# EAGLE board MiniPrinterController (EAGLE 9.6.2), part 1 of 2
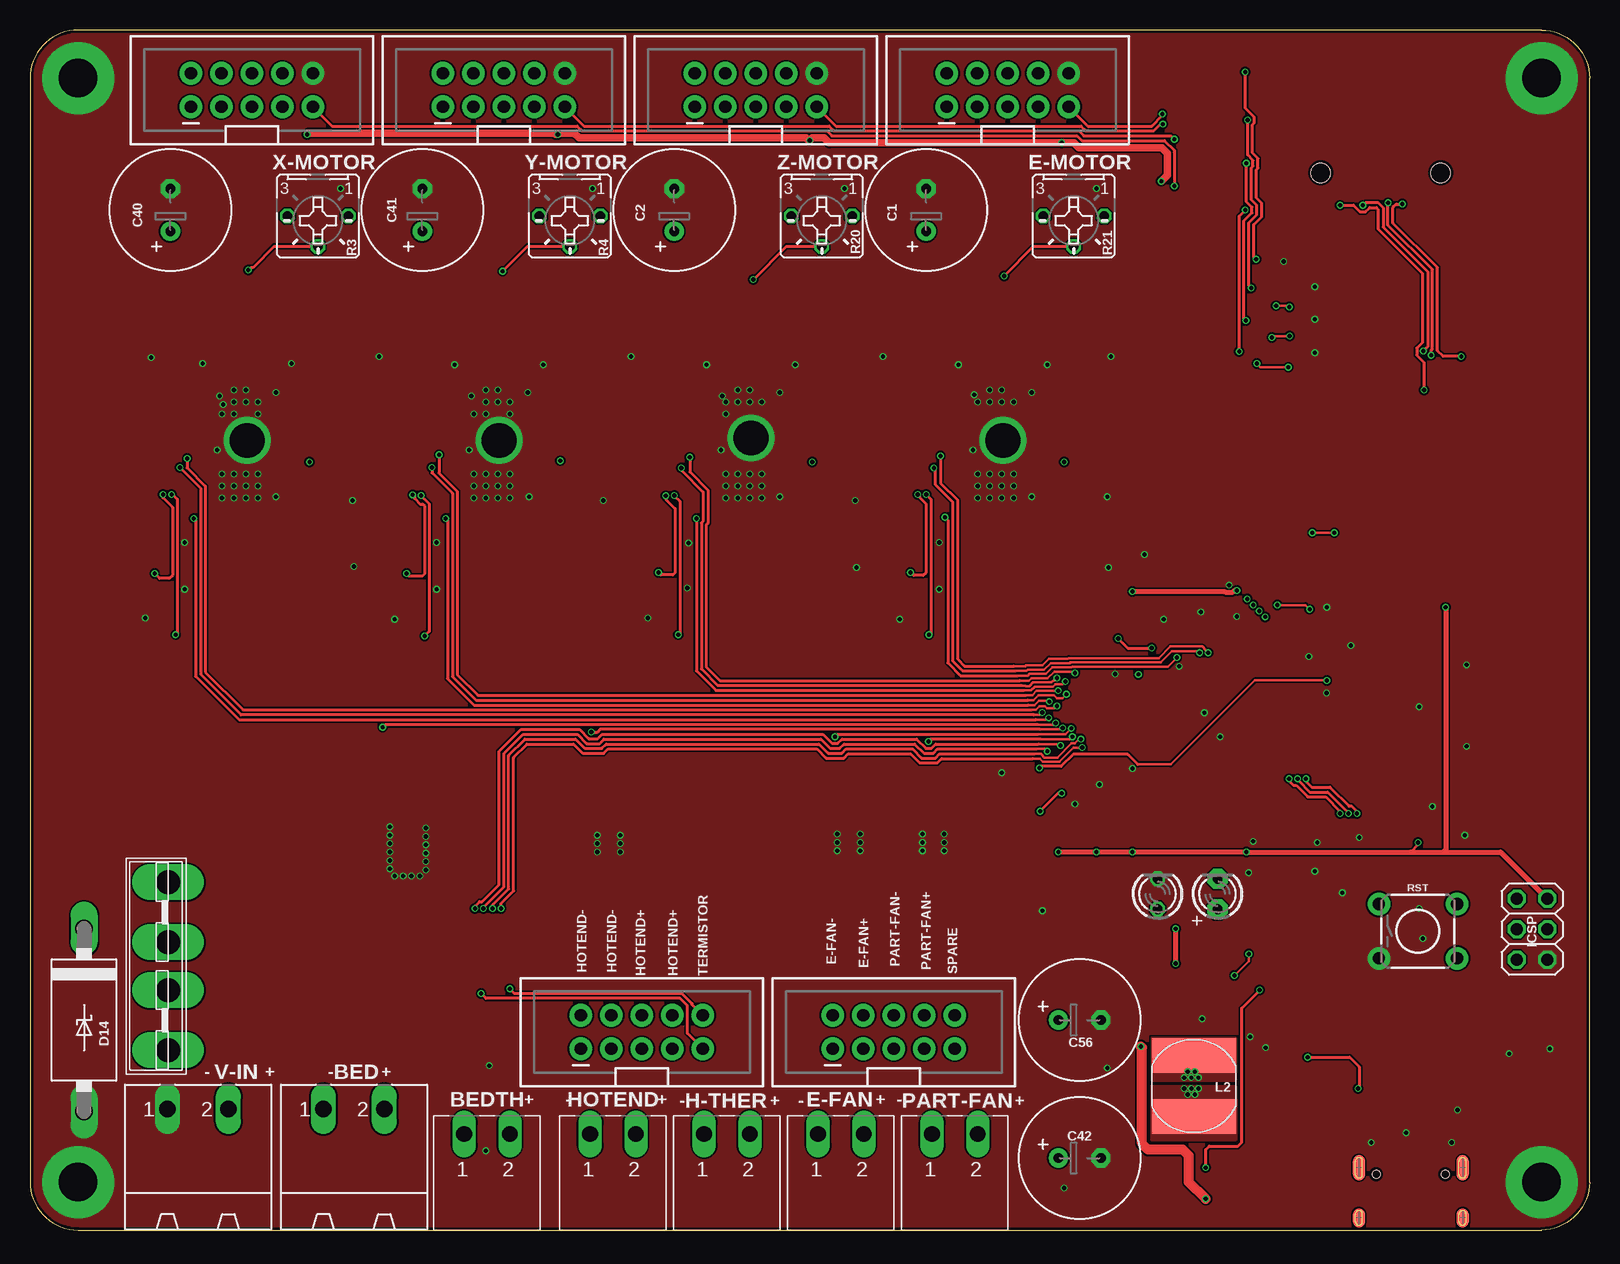
[diagram p0: board, top side]
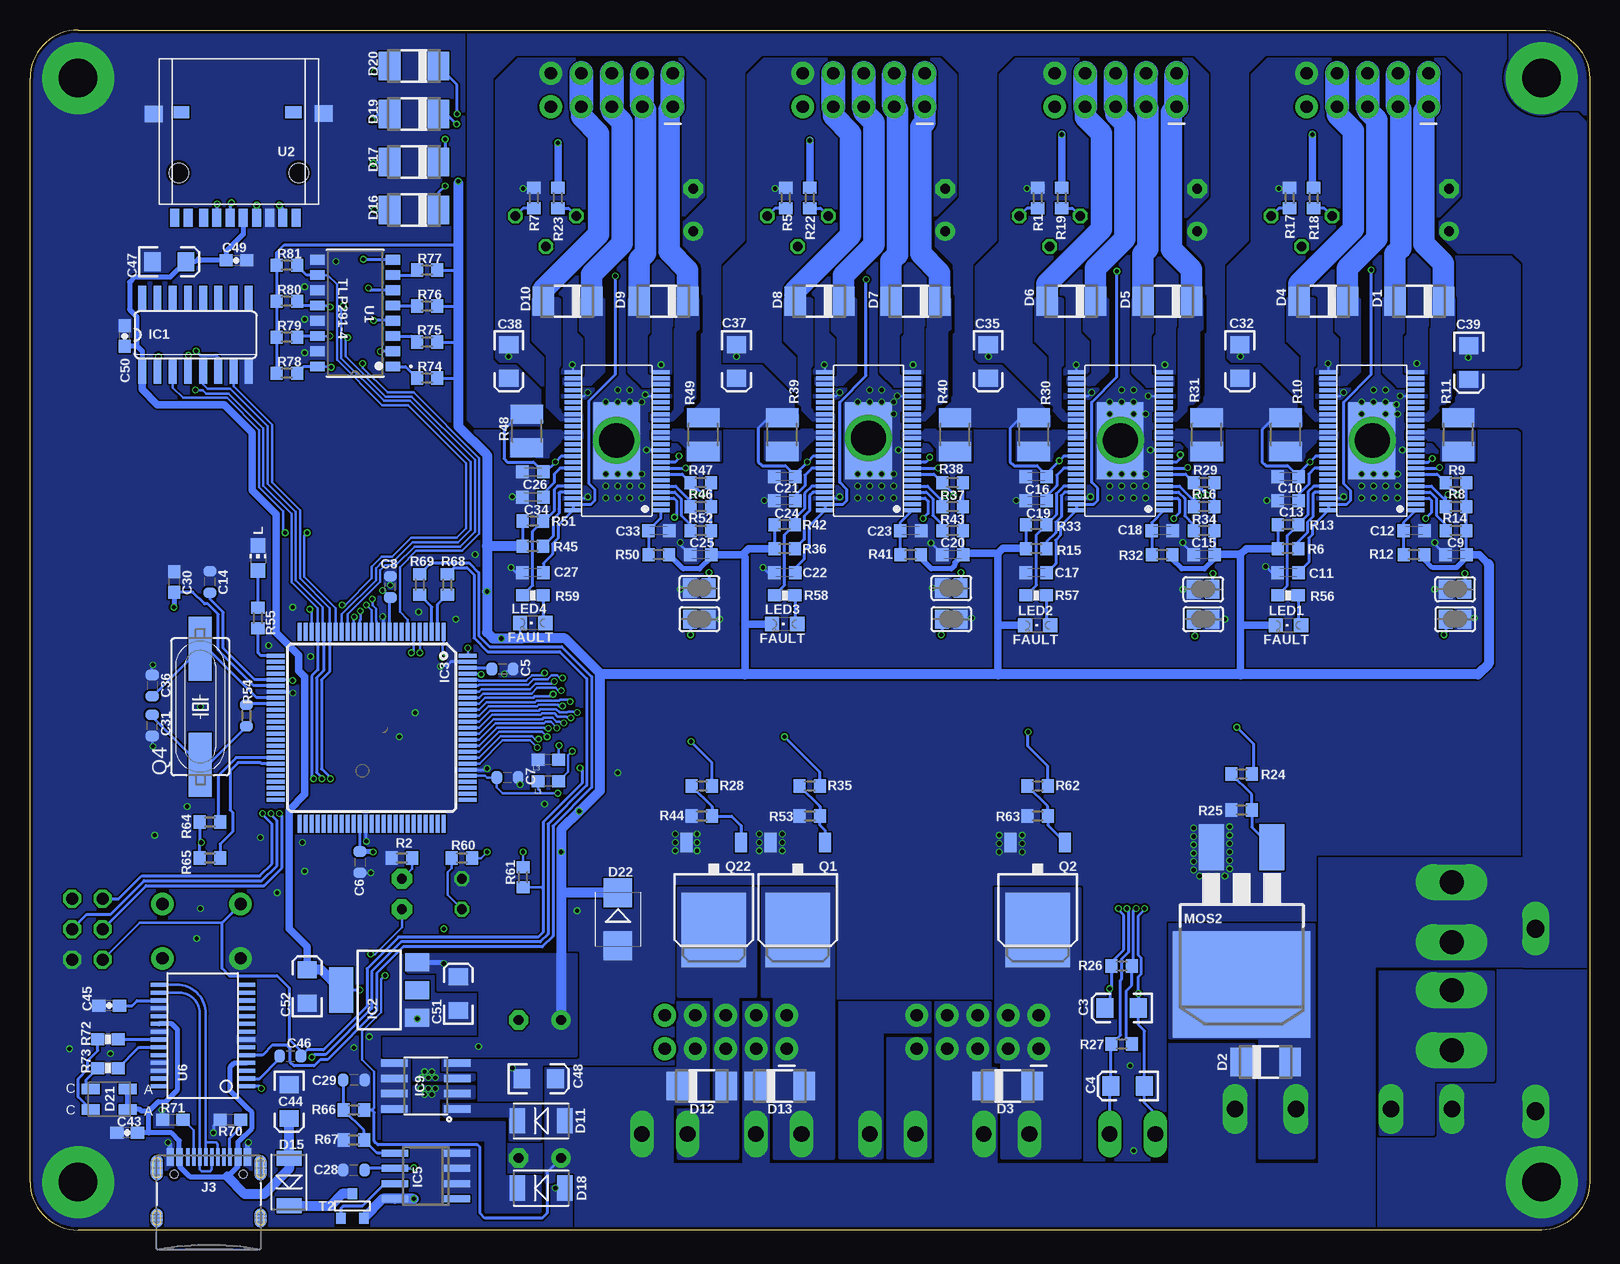
[diagram p1: board, bottom side, seen from below]

Size 130 x 100 mm. Coordinates in mm from the lower left corner, seen from the top.
Outline: 4,0 126,0 arc90 130,4 130,96 arc90 126,100 4,100 arc90 0,96 0,4 arc90 4,0
Copper layers (1*16): Top 0.035mm / dielectric 0.2mm / Bottom 0.035mm
Design rules "SeeedStudio_4layer_DRU_no_angle_20140221 *": minimum track width 8mil, minimum drill 12mil, track to track 6mil, track to pad 6mil, pad to pad 6mil, via to via 6mil, smd to smd 0mil, copper to edge 10mil, drill to drill 8mil, minimum pad ring 6mil, minimum via ring 4mil, stop-mask expansion 4mil, vias tented up to drill 25mil, thermal gap 10mil
Net classes: 0 default: width 0.203 mm, clearance 0.152 mm

## Footprints (pad centres in the part's own frame; a part is rotated, then mirrored left to right if it is on the bottom)
MSTBA2 = drill 1.397 long: 1 -2.54,5.08; 2 2.54,5.08
MC1.5/2-G-3.81 = drill 1.3 long: 1 -3.81,8; 2 0,8
E3,5-10 = drill 0.813 pad 1.6: + -1.778,0 | drill 0.813 pad 1.6 octagon: - 1.778,0
EIA3216 = smd 1.4 x 1.6: A 1.4,0; C -1.4,0
C0603-ROUND = smd 0.898 x 1.1: 1 -0.889,0; 2 0.889,0
C0603K = smd 1.05 x 1.08: 1 -0.875,0; 2 0.875,0
C0603 = smd 1.1 x 1: 1 -0.85,0; 2 0.85,0
0603-CAP = smd 1.1 x 1: 1 -0.85,0; 2 0.85,0
DO-214AC = smd 1.8 x 2.4: A 2.025,0; C -2.025,0
DO-214AC' = smd 1.27 x 2.1: 1 -1.98,0; 2 1.98,0
C4111-15 = drill 1.499 long: A 7.62,0; C -7.62,0
3528 = smd 1.5 x 0.9: 1 1.55,0.85; 2 1.55,-0.85; 3 -1.55,0.85; 4 -1.55,-0.85
SMB = smd 2.4 x 2.4: A 2.2,0; C -2.2,0
SO16 = smd 0.66 x 2.032: 1 -4.445,-3.073; 2 -3.175,-3.073; 3 -1.905,-3.073; 4 -0.635,-3.073; 5 0.635,-3.073; 6 1.905,-3.073; 7 3.175,-3.073; 8 4.445,-3.073; 9 4.445,3.073; 10 3.175,3.073; 11 1.905,3.073; 12 0.635,3.073; 13 -0.635,3.073; 14 -1.905,3.073; 15 -3.175,3.073; 16 -4.445,3.073
SOT223 = smd 1.5 x 2: 1 -2.3,-3.15; 2 0,-3.15; 3 2.3,-3.15 | smd 3.8 x 2: 4 0,3.15
TQFP100 = smd 1.5 x 0.35: 1 -8,6; 2 -8,5.5; 3 -8,5; 4 -8,4.5; 5 -8,4; 6 -8,3.5; 7 -8,3; 8 -8,2.5; 9 -8,2; 10 -8,1.5; 11 -8,1; 12 -8,0.5; 13 -8,0; 14 -8,-0.5; 15 -8,-1; 16 -8,-1.5; 17 -8,-2; 18 -8,-2.5; 19 -8,-3; 20 -8,-3.5; 21 -8,-4; 22 -8,-4.5; 23 -8,-5; 24 -8,-5.5; 25 -8,-6; 51 8,-6; 52 8,-5.5; 53 8,-5; 54 8,-4.5; 55 8,-4; 56 8,-3.5; 57 8,-3; 58 8,-2.5; 59 8,-2; 60 8,-1.5; 61 8,-1; 62 8,-0.5; 63 8,0; 64 8,0.5; 65 8,1; 66 8,1.5; 67 8,2; 68 8,2.5; 69 8,3; 70 8,3.5; 71 8,4; 72 8,4.5; 73 8,5; 74 8,5.5; 75 8,6 | smd 0.35 x 1.5: 26 -6,-8; 27 -5.5,-8; 28 -5,-8; 29 -4.5,-8; 30 -4,-8; 31 -3.5,-8; 32 -3,-8; 33 -2.5,-8; 34 -2,-8; 35 -1.5,-8; 36 -1,-8; 37 -0.5,-8; 38 0,-8; 39 0.5,-8; 40 1,-8; 41 1.5,-8; 42 2,-8; 43 2.5,-8; 44 3,-8; 45 3.5,-8; 46 4,-8; 47 4.5,-8; 48 5,-8; 49 5.5,-8; 50 6,-8; 76 6,8; 77 5.5,8; 78 5,8; 79 4.5,8; 80 4,8; 81 3.5,8; 82 3,8; 83 2.5,8; 84 2,8; 85 1.5,8; 86 1,8; 87 0.5,8; 88 0,8; 89 -0.5,8; 90 -1,8; 91 -1.5,8; 92 -2,8; 93 -2.5,8; 94 -3,8; 95 -3.5,8; 96 -4,8; 97 -4.5,8; 98 -5,8; 99 -5.5,8; 100 -6,8
SO08 = smd 0.6 x 2.2: 1 -1.905,-2.6; 2 -0.635,-2.6; 3 0.635,-2.6; 4 1.905,-2.6; 5 1.905,2.6; 6 0.635,2.6; 7 -0.635,2.6; 8 -1.905,2.6
SO08' = smd 0.61 x 2.21: 1 -1.905,-2.616; 2 -0.635,-2.616; 3 0.635,-2.616; 4 1.905,-2.616; 5 1.905,2.616; 6 0.635,2.616; 7 -0.635,2.616; 8 -1.905,2.616
2X03 = drill 1.016 octagon: 1 -2.54,-1.27; 2 -2.54,1.27; 3 0,-1.27; 4 0,1.27; 5 2.54,-1.27; 6 2.54,1.27
2X5-SHROUDED_LOCK = drill 1.016 pad 1.88: 1 -1.397,5.08; 2 1.397,5.08; 3 -1.397,2.54; 4 1.397,2.54; 5 -1.397,0; 6 1.397,0; 7 -1.397,-2.54; 8 1.397,-2.54; 9 -1.397,-5.08; 10 1.397,-5.08
USB-C-16P = smd 0.3 x 1.45: A5 -1.25,0; A6 -0.25,0; A7 0.25,0; A8 1.25,0; B5 1.75,0; B6 0.75,0; B7 -0.75,0; B8 -1.75,0 | smd 0.6 x 1.45: GND -3.225,0; GND2 3.225,0 | smd 1 x 2.1: SHLD1 -4.32,-0.915; SHLD2 4.32,-0.915 | smd 1 x 2.1 bottom: SHLD3 -4.32,-0.915; SHLD4 4.32,-0.915 | smd 1 x 1.6: SHLD5 -4.32,-5.095; SHLD8 4.32,-5.095 | smd 1 x 1.6 bottom: SHLD6 -4.32,-5.095; SHLD7 4.32,-5.095 | smd 0.55 x 1.45: VBUS1 -2.45,0; VBUS2 2.45,0 | hole 0.65: -2.89,-1.445; 2.89,-1.445
CHIP-LED0805 = smd 1.2 x 1.2: A 0,-1.05; C 0,1.05
0603 = smd 1.1 x 1: 1 -0.85,0; 2 0.85,0
CD75 = smd 7 x 2.85: 1 0,2.54; 2 0,-2.54
CHIPLED_0805 = smd 1.2 x 1.2: A 0,-1.05; C 0,1.05
LED3MM = drill 0.813 pad 1.676 octagon: A -1.27,0; K 1.27,0
D2PACK = smd 2.083 x 3.81: 1 -2.54,-8.89; 3 2.54,-8.89 | smd 11.43 x 8.89: 2 0,2.54
LED3MM' = drill 0.813 octagon: A -1.27,0; K 1.27,0
D-PAK_TO252AA = smd 1 x 1.6: 1 -2.28,-4.8; 3 2.28,-4.8 | smd 5.4 x 6.2: 4 0,2.5
HC49UP = smd 5.334 x 1.93: 1 -4.826,0; 2 4.826,0
R0603 = smd 1 x 1.1: 1 -0.85,0; 2 0.85,0
B25P = drill 0.813 octagon: A -2.54,0; E 2.54,0; S 0,2.54
R1210 = smd 1.6 x 2.7: 1 -1.4,0; 2 1.4,0
R0603@1 = smd 1 x 1.1: 1 -0.85,0; 2 0.85,0
R0603-ROUND = smd 0.898 x 1.1: 1 -0.889,0; 2 0.889,0
0603-RES = smd 1.1 x 1: 1 -0.85,0; 2 0.85,0
0603@1 = smd 1.1 x 1: 1 -0.85,0; 2 0.85,0
TACTILE_SWITCH_PTH_6.0MM = drill 1.016 pad 1.88: 1 -3.251,2.261; 2 3.251,2.261; 3 -3.251,-2.261; 4 3.251,-2.261
SJ = smd 1.168 x 1.6: 1 -0.762,0; 2 0.762,0
SOT-23 = smd 0.787 x 0.889: 1 0.025,-1.016; 2 -0.94,1.016; 3 0.991,1.016
SO16_TOS = smd 1.194 x 0.813: 1 -3.15,4.445; 2 -3.15,3.175; 3 -3.15,1.905; 4 -3.15,0.635; 5 -3.15,-0.635; 6 -3.15,-1.905; 7 -3.15,-3.175; 8 -3.15,-4.445; 9 3.15,-4.445; 10 3.15,-3.175; 11 3.15,-1.905; 12 3.15,-0.635; 13 3.15,0.635; 14 3.15,1.905; 15 3.15,3.175; 16 3.15,4.445
USD-SOCKET-PP = smd 0.75 x 1.5: 1 2.925,1.125; 2 1.825,1.125; 3 0.725,1.125; 4 -0.375,1.125; 5 -1.475,1.125; 6 -2.575,1.125; 7 -3.675,1.125; 8 -4.775,1.125; CD1 5.325,1.125; CD2 4.225,1.125 | smd 1.4 x 1: CDNC1 -4.55,-7.65 | smd 1.3 x 1: CDNC2 4.775,-7.65 | smd 1.5 x 1.35: GND1 -7.075,-7.55; GND2 7.075,-7.5 | hole 1.6: -5,-2.6; 5,-2.6
SSOP28DB = smd 0.348 x 1.397: 1 -4.225,-3.656; 2 -3.575,-3.656; 3 -2.925,-3.656; 4 -2.275,-3.656; 5 -1.625,-3.656; 6 -0.975,-3.656; 7 -0.325,-3.656; 8 0.325,-3.656; 9 0.975,-3.656; 10 1.625,-3.656; 11 2.275,-3.656; 12 2.925,-3.656; 13 3.575,-3.656; 14 4.225,-3.656; 15 4.225,3.656; 16 3.575,3.656; 17 2.925,3.656; 18 2.275,3.656; 19 1.625,3.656; 20 0.975,3.656; 21 0.325,3.656; 22 -0.325,3.656; 23 -0.975,3.656; 24 -1.625,3.656; 25 -2.275,3.656; 26 -2.925,3.656; 27 -3.575,3.656; 28 -4.225,3.656
TB67S109AFTG-HTSSPO48-P-300-0.50 = smd 1.45 x 0.35: CLK -3.65,2.3; CS/CCW -3.65,4.8; DMODE0 3.65,4.3; DMODE1 -3.65,3.8; DMODE2 -3.65,2.8; ENABLE -3.65,1.8; GND -3.65,0.8; GND2 -3.65,-3.7; GND3 -3.65,-5.7; GND4 3.65,-5.7; GND5 3.65,-3.7; GND6 3.65,4.8; LO 3.65,3.8; MO -3.65,4.3; NC1 -3.65,5.3; NC2 -3.65,3.3; NC3 -3.65,0.3; NC4 -3.65,-1.2; NC5 -3.65,-2.7; NC6 -3.65,-3.2; NC7 -3.65,-4.2; NC8 3.65,-4.2; NC9 3.65,-3.2; NC10 3.65,-2.7; NC11 3.65,-1.2; NC12 3.65,0.3; NC13 3.65,0.8; NC14 3.65,1.8; NC15 3.65,2.8; NC16 3.65,3.3; OSCM -3.65,5.8; OUTA+1 -3.65,-1.7; OUTA+2 -3.65,-2.2; OUTA-1 -3.65,-4.7; OUTA-2 -3.65,-5.2; OUTB+1 3.65,-2.2; OUTB+2 3.65,-1.7; OUTB-1 3.65,-5.2; OUTB-2 3.65,-4.7; RESET -3.65,1.3; RSA -3.65,-0.2; RSA2 -3.65,-0.7; RSB1 3.65,-0.7; RSB2 3.65,-0.2; VCC 3.65,2.3; VM 3.65,1.3; VREFA 3.65,5.8; VREFB 3.65,5.3 | smd 3.9 x 6.4: GND-PAD 0,0
ATQ-FUSE = drill 2 long: TERM1.1 -7,0; TERM1.2 -2,0; TERM2.1 2,0; TERM2.2 7,0

## Placement (x,y rotation side)
BED  Phoenix Pluggable 5.08mm 2 way  [MSTBA2]  27,5 0 top
BEDTH  Phoenix Pluggable 3.81mm 2 way  [MC1.5/2-G-3.81]  40,0 0 top
C1  220µF 50V  [E3,5-10]  74.7,85 90 top
C2  220µF 50V  [E3,5-10]  53.7,85 90 top
C3  10uF 50V  [EIA3216]  39,18.5 180 bottom
C4  10uF 50V  [EIA3216]  38.5,12 180 bottom
C5  100n  [C0603-ROUND]  90.61,46.76 0 bottom
C6  100n  [C0603-ROUND]  102.51,30.66 270 bottom
C7  100n  [C0603-ROUND]  90.19,37.72 0 bottom
C8  100n  [C0603-ROUND]  99.97,53.6 90 bottom
C9  0.1u  [C0603K]  11.14,56.28 180 bottom
C10  0.1u  [C0603K]  25.14,62.78 180 bottom
C11  0.1u  [C0603K]  25.14,54.78 180 bottom
C12  270pF  [C0603K]  14.64,58.28 0 bottom
C13  0.1uf  [C0603K]  25.14,60.78 180 bottom
C14  22p  [C0603-ROUND]  115,54 90 bottom
C15  0.1u  [C0603K]  32.12,56.28 180 bottom
C16  0.1u  [C0603K]  46.12,62.78 180 bottom
C17  0.1uf  [C0603K]  46.12,54.78 180 bottom
C18  270pF  [C0603K]  35.62,58.28 0 bottom
C19  0.1u  [C0603K]  46.12,60.78 180 bottom
C20  0.1u  [C0603K]  53.1,56.28 180 bottom
C21  0.1u  [C0603K]  67.1,62.78 180 bottom
C22  0.1u  [C0603K]  67.1,54.78 180 bottom
C23  270pF  [C0603K]  56.6,58.28 0 bottom
C24  0.1u  [C0603K]  67.1,60.78 180 bottom
C25  0.1u  [C0603K]  74.08,56.28 180 bottom
C26  0.1u  [C0603K]  88.08,63.18 180 bottom
C27  0.1u  [C0603K]  88.08,54.78 180 bottom
C28  100n  [C0603-ROUND]  103,5 0 bottom
C29  100n  [C0603-ROUND]  103,12.5 180 bottom
C30  100n  [C0603]  118,54 270 bottom
C31  22p  [C0603-ROUND]  119.81,42.06 90 bottom
C32  10uF 50V  [EIA3216]  29.14,72.38 270 bottom
C33  270pF  [C0603K]  77.58,58.28 0 bottom
C34  0.1u  [C0603K]  88.08,61.08 180 bottom
C35  10uF 50V  [EIA3216]  50.12,72.38 270 bottom
C36  22p  [C0603-ROUND]  119.81,45.36 270 bottom
C37  10uF 50V  [EIA3216]  71.1,72.38 270 bottom
C38  10uF 50V  [EIA3216]  90.08,72.38 270 bottom
C39  10uF 50V  [EIA3216]  10.06,72.28 270 bottom
C40  220µF 50V  [E3,5-10]  11.7,85 90 top
C41  220µF 50V  [E3,5-10]  32.7,85 90 top
C42  220µF 50V  [E3,5-10]  87.5,6 0 top
C43  0.1uF  [0603-CAP]  121.9,8.1 180 bottom
C44  10uF  [EIA3216]  108.4,10.7 270 bottom
C45  0.1uF  [0603-CAP]  123.4,18.7 180 bottom
C46  0.1uF  [C0603-ROUND]  108.3,14.5 0 bottom
C47  10uF  [EIA3216]  118.4,80.7 0 bottom
C48  10uF 50V  [EIA3216]  87.6,12.6 0 bottom
C49  0.1uF  [0603-CAP]  112.8,80.8 0 bottom
C50  0.1uF  [0603-CAP]  122.1,74.5 90 bottom
C51  10uF  [EIA3216]  94.3,19.7 90 bottom
C52  10uF  [EIA3216]  106.9,20.3 90 bottom
C56  220µF 50V  [E3,5-10]  87.5,17.5 0 top
D1  SMAJ90CA  [DO-214AC]  14.2,77.4 180 bottom
D2  M4  [DO-214AC]  27,14 0 bottom
D3  M4  [DO-214AC]  48.5,12 0 bottom
D4  SMAJ90CA  [DO-214AC]  22.2,77.4 180 bottom
D5  SMAJ90CA  [DO-214AC]  35.2,77.4 180 bottom
D6  SMAJ90CA  [DO-214AC]  43.2,77.4 180 bottom
D7  SMAJ90CA  [DO-214AC]  56.2,77.4 180 bottom
D8  SMAJ90CA  [DO-214AC]  64.2,77.4 180 bottom
D9  SMAJ90CA  [DO-214AC]  77.2,77.4 180 bottom
D10  SMAJ90CA  [DO-214AC]  85.2,77.4 180 bottom
D11  SS34  [DO-214AC']  87.4,9.1 0 bottom
D12  M4  [DO-214AC]  74,12 0 bottom
D13  M4  [DO-214AC]  67.5,12 0 bottom
D14  SA24CA  [C4111-15]  4.5,17.5 270 top
D15  SS34  [DO-214AC']  108.4,4 90 bottom
D16  M4  [DO-214AC]  98,85 180 bottom
D17  M4  [DO-214AC]  98,89 180 bottom
D18  SS34  [DO-214AC']  87.4,3.5 0 bottom
D19  M4  [DO-214AC]  98,93 180 bottom
D20  M4  [DO-214AC]  98,97 180 bottom
D21  RED/GRN BICOLOR 3528 LED  [3528]  123.4,10.9 0 bottom
D22  5.1V  [SMB]  81,25.9 270 bottom
ETHERM  Phoenix Pluggable 3.81mm 2 way  [MC1.5/2-G-3.81]  60,0 0 top
IC1  4050D  [SO16]  116.2,74.6 0 bottom
IC2  1117-33  [SOT223]  100.9,20 90 bottom
IC3  ATMEGA2560-16AU  [TQFP100]  101.51,41.86 270 bottom
IC5  LM358D  [SO08]  97,4.5 90 bottom
IC9  XL1509-5.0E1  [SO08']  97,12 90 bottom
ICSP  ICSP  [2X03]  125.21,25.07 270 top
J1  [2X5-SHROUDED_LOCK]  51,16.5 90 top
J2  [2X5-SHROUDED_LOCK]  72,16.5 90 top
J3  USB-C-Socket  [USB-C-16P]  115.1,6.1 0 bottom
J6  [2X5-SHROUDED_LOCK]  39.5,95 90 top
J7  [2X5-SHROUDED_LOCK]  81.5,95 90 top
J8  [2X5-SHROUDED_LOCK]  60.5,95 90 top
L  YELLOW  [CHIP-LED0805]  111,56 0 bottom
L1  39nH  [0603]  86.8,37.4 180 bottom
L2  68uH  [CD75]  97,12 0 top
L3  39nH  [0603]  86.8,39.2 180 bottom
LED1  0802 SIDE EMITTING LED RED  [CHIPLED_0805]  25.1,50.4 90 bottom
LED2  0802 SIDE EMITTING LED RED  [CHIPLED_0805]  46,50.4 90 bottom
LED3  0802 SIDE EMITTING LED RED  [CHIPLED_0805]  67.1,50.5 90 bottom
LED4  0802 SIDE EMITTING LED RED  [CHIPLED_0805]  88.1,50.6 90 bottom
LED6  0802 SIDE EMITTING LED GREEN  [LED3MM]  99,28 90 top
MOS2  IRLR024  [D2PACK]  29,23 180 bottom
ON  GREEN  [LED3MM']  94,28 90 top
PWRIN  Phoenix Pluggable 5.08mm 2 way  [MSTBA2]  14,5 0 top
Q1  IRLR024  [D-PAK_TO252AA]  66,27.5 180 bottom
Q2  IRLR024  [D-PAK_TO252AA]  46,27.5 180 bottom
Q4  16Mhz  [HC49UP]  115.8,43.6 90 bottom
Q22  IRLR024  [D-PAK_TO252AA]  73,27.5 180 bottom
R1  3K6  [R0603]  46,86 270 bottom
R2  4K7  [R0603]  99,31 0 bottom
R3  10K  [B25P]  24,84.5 180 top
R4  10K  [B25P]  45,84.5 180 top
R5  3K6  [R0603]  67,86 270 bottom
R6  10k  [R0603]  25.14,56.78 180 bottom
R7  3K6  [R0603]  88,86 270 bottom
R8  10k  [R0603]  11.14,60.28 0 bottom
R9  10k  [R0603]  11.14,62.28 0 bottom
R10  0.22R 3212  [R1210]  25.34,66.28 90 bottom
R11  0.22R 3212  [R1210]  10.94,66.28 90 bottom
R12  6K8  [R0603]  14.64,56.28 0 bottom
R13  10k  [R0603]  25.14,58.78 180 bottom
R14  10k  [R0603]  11.14,58.28 0 bottom
R15  10k  [R0603]  46.12,56.78 180 bottom
R16  10k  [R0603]  32.12,60.28 0 bottom
R17  3K6  [R0603]  25,86 270 bottom
R18  5K1  [R0603]  23,86 90 bottom
R19  5K1  [R0603]  44,86 90 bottom
R20  10K  [B25P]  66,84.5 180 top
R21  10K  [B25P]  87,84.5 180 top
R22  5K1  [R0603]  65,86 90 bottom
R23  5K1  [R0603]  86,86 90 bottom
R24  10r  [R0603]  29,38 180 bottom
R25  100k  [R0603]  29,35 0 bottom
R26  4k7  [R0603]  39,22 180 bottom
R27  4k7  [R0603]  39,15.5 180 bottom
R28  10R  [R0603@1]  74,37 0 bottom
R29  10k  [R0603]  32.12,62.28 0 bottom
R30  0.22R 3212  [R1210]  46.32,66.28 90 bottom
R31  0.22R 3212  [R1210]  31.92,66.28 90 bottom
R32  6K8  [R0603]  35.62,56.28 0 bottom
R33  10k  [R0603]  46.12,58.78 180 bottom
R34  10k  [R0603]  32.12,58.28 0 bottom
R35  10R  [R0603@1]  65,37 0 bottom
R36  10k  [R0603]  67.1,56.78 180 bottom
R37  10k  [R0603]  53.1,60.28 0 bottom
R38  10k  [R0603]  53.1,62.28 0 bottom
R39  0.22R 3212  [R1210]  67.3,66.28 90 bottom
R40  0.22R 3212  [R1210]  52.9,66.28 90 bottom
R41  6K8  [R0603]  56.6,56.28 0 bottom
R42  10k  [R0603]  67.1,58.78 180 bottom
R43  10k  [R0603]  53.1,58.28 0 bottom
R44  100k  [R0603]  74,34.5 0 bottom
R45  10k  [R0603]  88.08,56.98 180 bottom
R46  10k  [R0603]  74.08,60.28 0 bottom
R47  10k  [R0603]  74.08,62.28 0 bottom
R48  0.22R 3212  [R1210]  88.58,66.58 90 bottom
R49  0.22R 3212  [R1210]  73.88,66.28 90 bottom
R50  6K8  [R0603]  77.58,56.28 0 bottom
R51  10k  [R0603]  88.08,59.08 180 bottom
R52  10k  [R0603]  74.08,58.28 0 bottom
R53  100k  [R0603]  65,34.5 0 bottom
R54  27R  [R0603-ROUND]  111.94,42.87 270 bottom
R55  1k  [R0603]  111,51 90 bottom
R56  330  [0603-RES]  25.14,52.88 180 bottom
R57  330  [0603-RES]  46.12,52.88 180 bottom
R58  330  [0603-RES]  67.1,52.88 180 bottom
R59  330  [0603-RES]  88.08,52.88 180 bottom
R60  1k  [R0603]  94,31 180 bottom
R61  10k  [R0603]  88.9,29.4 90 bottom
R62  10R  [R0603]  46,37 180 bottom
R63  100k  [R0603]  46,34.5 0 bottom
R64  10k  [R0603]  115,34 180 bottom
R65  10k  [R0603]  115,31 180 bottom
R66  10k  [R0603]  103,10 0 bottom
R67  10k  [R0603]  103,7.5 0 bottom
R68  1k  [R0603]  95.21,53.78 270 bottom
R69  1k  [R0603]  97.51,53.78 270 bottom
R70  5.1k  [0603@1]  113.3,9.2 0 bottom
R71  5.1k  [0603@1]  118.1,9.2 0 bottom
R72  1K  [0603-RES]  123.5,15.9 180 bottom
R73  1K  [0603-RES]  123.5,13.5 180 bottom
R74  1K  [R0603]  96.9,71 180 bottom
R75  1K  [R0603]  96.9,74 180 bottom
R76  1K  [R0603]  96.9,77 180 bottom
R77  1K  [R0603]  96.9,80 180 bottom
R78  10K  [R0603]  108.6,71.4 180 bottom
R79  10K  [R0603]  108.6,74.4 180 bottom
R80  10K  [R0603]  108.6,77.4 180 bottom
R81  10K  [R0603]  108.6,80.4 180 bottom
RST  MOMENTARY-SWITCH-SPST-PTH-6.0MM  [TACTILE_SWITCH_PTH_6.0MM]  115.7,24.9 0 top
SJ1  [SJ]  11.2,50.9 180 bottom
SJ2  [SJ]  11.2,53.4 0 bottom
SJ3  [SJ]  32.2,50.9 180 bottom
SJ4  [SJ]  32.2,53.4 0 bottom
SJ5  [SJ]  74.2,50.9 180 bottom
SJ6  [SJ]  74.2,53.5 0 bottom
SJ7  [SJ]  53.2,50.9 180 bottom
SJ8  [SJ]  53.2,53.5 0 bottom
T2  FDN340P  [SOT-23]  103.1,2 180 bottom
U1  TLP291-4  [SO16_TOS]  102.9,76.4 180 bottom
U2  USD-SOCKETUSD  [USD-SOCKET-PP]  112.6,85.5 180 bottom
U6  FT232RLSSOP  [SSOP28DB]  115.6,16.2 90 bottom
U$1  TB67S109AFNG  [TB67S109AFTG-HTSSPO48-P-300-0.50]  39.12,65.78 180 bottom
U$2  TB67S109AFNG  [TB67S109AFTG-HTSSPO48-P-300-0.50]  60.1,65.78 180 bottom
U$4  ATQ-FUSE  [ATQ-FUSE]  11.5,22 90 top
U$7  TB67S109AFNG  [TB67S109AFTG-HTSSPO48-P-300-0.50]  81.08,65.78 180 bottom
U$17  TB67S109AFNG  [TB67S109AFTG-HTSSPO48-P-300-0.50]  18.14,65.78 180 bottom
X-END1  Phoenix Pluggable 3.81mm 2 way  [MC1.5/2-G-3.81]  50.5,0 0 top
X-END2  Phoenix Pluggable 3.81mm 2 way  [MC1.5/2-G-3.81]  79,0 0 top
X-END3  Phoenix Pluggable 3.81mm 2 way  [MC1.5/2-G-3.81]  69.5,0 0 top
Z-CONN1  [2X5-SHROUDED_LOCK]  18.5,95 90 top

## Library data of the parts
BED PWRIN = con-phoenix-508; MF: FARNELL; MPN: 1757242; OC_FARNELL: 3705171; OC_NEWARK: 71C4161
BEDTH ETHERM X-END1-X-END3 = jt-con-phoenix-3.81
C1 C2 C9-C13 C15-C27 C33 C34 C40-C42 C56 = rcl; SPICEPREFIX: C
C3 C4 C32 C35 C37-C39 C43-C45 C47-C52 L1 L3 R72 R73 U6 = SparkFun
C5-C8 C14 C28 C29 C31 C36 C46 R54 = SmartPrj
C30 R2 R28 R35 = rcl
D1-D10 D12-D14 D16 D17 D19 D20 D22 = diode
D11 D15 D18 = dp_devices
D21 = Wurth_Elektronik_Optoelectronics_rev15c; COMPANY-URL: http://www.we-online.de; CREATED-BY: Christin Otto; CREATED-DATE: APR 2013; DATASHEET-URL: http://katalog.we-online.de/en/led/WL-SBTW?m=t&sq=sbtw&sp=&sp=http%3A%2F%2Fwww.we-online.de%2Fweb%2Fen%2Felectronic_components%2Fsearchpage_PBS.php%3Fsearch%3Dsbtw#vs_t2:2; MANUFACTURER: Würth Elektronik eiSos GmbH
IC1 = 40xx
IC2 = v-reg
IC3 = atmel-2005
IC5 = linear
IC9 MOS2 Q1 Q2 Q22 = Cohesion_parts
ICSP = pinhead
J1 J2 J6-J8 Z-CONN1 = SparkFun-Connectors; PROD_ID: CONN-08671; SF_ID: PRT-08506
J3 = SparkFun-Connectors; PROD_ID: CONN-14122
L ON = led
L2 = rc-master-smd
LED1-LED4 LED6 = adafruit
Q4 = crystal; OC_FARNELL: unknown; OC_NEWARK: unknown
R1 R5-R19 R22-R27 R29-R34 R36-R53 R62 R63 R74-R81 = resistor
R3 R4 R20 R21 = pot
R55 R60 R61 R64-R69 = rcl; SPICEPREFIX: R
R56-R59 = SparkFun-Resistors; PROD_ID: RES-00818
R70 R71 = SparkFun-Resistors; PROD_ID: RES-12083
RST = SparkFun-Switches; PROD_ID: SWCH-08441; SF_SKU: COM-00097
SJ1-SJ8 = jumper
T2 = zetex
U1 = Toshiba TLP291-4 Optocoupler; COPYRIGHT: Copyright (C) 2018 Accelerated Designs. All rights reserved; MANUFACTURER_PART_NUMBER: TLP291-4; SOURCELIBRARY: Toshiba_2019-02-06; VENDOR: Toshiba
U2 = SparkFun-Connectors_PETERMICROSDEBAY
U$1 U$2 U$7 U$17 = TB67S109AFTG
U$4 = ATQ Fuse Holder out of 4.3mm pcb terminals

## Nets
3VUSB: C45.1 U6.17
5VREG: C6.1 C7.1 C8.1 C9.1 C15.1 C20.1 C25.1 C30.2 C51.A C56.+ D22.C IC2.3 IC3.10 IC3.31 IC3.61 IC3.80 IC3.100 IC5.8 IC9.3 ICSP.2 L1.2 L2.1 LED1.C LED2.C LED3.C LED4.C R6.2 R8.2 R9.2 R12.2 R13.2 R14.2 R15.2 R16.2 R18.2 R19.2 R22.2 R23.2 R29.2 R32.2 R33.2 R34.2 R36.2 R37.2 R38.2 R41.2 R42.2 R43.2 R45.2 R46.2 R47.2 R50.2 R51.2 R52.2 R60.1 R61.2 R64.2 R65.2 R74.1 R75.1 R76.1 R77.1 R78.2 R79.2 R80.2 R81.2 T2.2
+3V3: C28.2 C47.A C49.1 C50.1 C52.A IC1.1 IC2.4 IC5.6 U2.4
_E-ENDSTOP-C1: D20.C J7.9
_X-ENDSTOP-C1: D16.C Z-CONN1.9
_Y-ENDSTOP-C1: D17.C J6.9
_Z-ENDSTOP-C1: D19.C J8.9
AGND: BEDTH.1 C3.C C4.C ETHERM.1 J1.9 L3.1
AREF: C5.1 IC3.98
AVCC: L1.1 R26.1 R27.1
BED-NEG1: BED.1 D2.A MOS2.2
CC1: J3.A5 R71.2
CC2: J3.B5 R70.2
CMP: C29.2 IC5.5 R66.1 R67.2
CS: IC1.2 U2.2
CTS: U6.11
D0: IC3.2 R68.2
D1: IC3.3 R69.2
D2/EENABLE: IC3.6 U$7.ENABLE
D3: IC3.7 R78.1 U1.16
D4/EDIR: IC3.1 U$7.CS/CCW
D5/ESTEP: IC3.5 U$7.CLK
D6: IC3.8
D7: IC3.9
D8: IC3.17 R79.1 U1.14
D9: IC3.18 R80.1 U1.12
D10: IC3.23 R81.1 U1.10
D11: IC3.24
D12: IC3.25
D13: IC3.26 R55.1
D14/TXD3: IC3.64
D15/RXD3: IC3.63
D16/TXD2: IC3.13
D17/RXD2: IC3.12
D18/TXD1: IC3.46
D19/RXD1: IC3.45
D20/SDA: IC3.44 R65.1
D21/SCL: IC3.43 R64.1
D22: IC3.78
D23: IC3.77
D24: IC3.76
D25: IC3.75
D26: IC3.74
D27: IC3.73
D28: IC3.72
D29: IC3.71
D30: IC3.60
D31: IC3.59
D32: IC3.58
D33: IC3.57
D34: IC3.56
D35: IC3.55
D36: IC3.54
D37: IC3.53
D38: IC3.50
D39: IC3.70
D40: IC3.52
D41: IC3.51
D42: IC3.42
D43: IC3.41
D44: IC3.40
D45: IC3.39
D46: IC3.38
D47: IC3.37
D48: IC3.36
D49: IC3.35
D50/MISO: IC3.22 ICSP.1 U2.7
D51/MOSI: IC1.5 IC3.21 ICSP.4
D52/SCK: IC1.7 IC3.20 ICSP.3
D53/SS: IC1.3 IC3.19
D54/ADC0: IC3.97
D55/ADC1/ZENABLE: IC3.96 U$2.ENABLE
D56/ADC2/ZSTEP: IC3.95 U$2.CLK
D57/ADC3/ZDIR: IC3.94 U$2.CS/CCW
D58/ADC4/YENABLE: IC3.93 U$1.ENABLE
D59/ADC5/YSTEP: IC3.92 U$1.CLK
D60/ADC6/YDIR: IC3.91 U$1.CS/CCW
D61/ADC7/XENABLE: IC3.90 U$17.ENABLE
D62/ADC8/XSTEP: IC3.89 U$17.CLK
D63/ADC9/XDIR: IC3.88 U$17.CS/CCW
D64/ADC10/BED: IC3.87 R24.1
D65/ADC11/HOTEND: IC3.86 R62.1
D66/ADC12/E-FAN: IC3.85 R35.2
D67/ADC13: IC3.84 R28.2
D68/ADC14/TH2_BED: BEDTH.2 C4.A IC3.83 R27.2
D69/ADC15/TH1_HOTEND: C3.A ETHERM.2 IC3.82 J1.10 R26.2
D+1: J3.A6 J3.B6 U6.15
D-1: J3.A7 J3.B7 U6.16
DI: IC1.4 U2.3
DTR: C46.1 U6.2
E-FAN-NEG: D13.A J2.1 J2.2 Q1.4 X-END3.1
EMODE0: R45.1 U$7.DMODE0
EMODE1: R46.1 SJ5.2 U$7.DMODE1
EMODE2: R47.1 SJ6.2 U$7.DMODE2
EOUT-A+: D9.C J7.1 J7.2 U$7.OUTA+1 U$7.OUTA+2
EOUT-A-: D9.A J7.3 J7.4 U$7.OUTA-1 U$7.OUTA-2
EOUT-B+: D10.A J7.7 J7.8 U$7.OUTB+1 U$7.OUTB+2
EOUT-B-: D10.C J7.5 J7.6 U$7.OUTB-1 U$7.OUTB-2
GATE_CMD: IC5.7 T2.3
GND: C1.- C2.- C5.2 C6.2 C7.2 C8.2 C9.2 C10.2 C11.2 C12.2 C13.2 C14.2 C15.2 C16.2 C17.2 C18.2 C19.2 C20.2 C21.2 C22.2 C23.2 C24.2 C25.2 C26.2 C27.2 C28.1 C29.1 C30.1 C31.1 C32.C C33.2 C34.2 C35.C C36.1 C37.C C38.C C39.C C40.- C41.- C42.- C43.2 C44.C C45.2 C47.C C48.C C49.2 C50.2 C51.C C52.C C56.- D14.A D18.2 D22.A IC1.8 IC2.1 IC3.11 IC3.32 IC3.62 IC3.81 IC3.99 IC5.2 IC5.3 IC5.4 IC9.4 IC9.5 IC9.6 IC9.7 IC9.8 ICSP.6 J3.GND J3.GND2 J6.10 J7.10 J8.10 L3.2 L.C MOS2.3 ON.K PWRIN.1 Q1.3 Q2.3 Q22.3 R1.1 R2.1 R5.1 R7.1 R17.1 R25.1 R44.1 R53.1 R63.1 R67.1 R70.1 R71.1 RST.3 SJ1.1 SJ2.1 SJ3.1 SJ4.1 SJ5.1 SJ6.1 SJ7.1 SJ8.1 U1.9 U1.11 U1.13 U1.15 U2.6 U2.GND1 U2.GND2 U6.7 U6.18 U6.21 U6.25 U6.26 U$1.GND U$1.GND2 U$1.GND3 U$1.GND4 U$1.GND5 U$1.GND6 U$1.GND-PAD U$2.GND U$2.GND2 U$2.GND3 U$2.GND4 U$2.GND5 U$2.GND6 U$2.GND-PAD U$7.GND U$7.GND2 U$7.GND3 U$7.GND4 U$7.GND5 U$7.GND6 U$7.GND-PAD U$17.GND U$17.GND2 U$17.GND3 U$17.GND4 U$17.GND5 U$17.GND6 U$17.GND-PAD Z-CONN1.10
HOTEND-NEG1: D3.A J1.1 J1.2 J1.3 J1.4 Q2.4 X-END1.1
M8RXD: R68.1 U6.1
M8TXD: R69.1 U6.5
N$1: D18.1 IC9.2 L2.2
N$2: MOS2.1 R24.2 R25.2
N$3: Q2.1 R62.2 R63.2
N$4: D21.4 R72.2
N$5: R1.2 R4.A
N$6: R5.2 R20.A
N$7: R7.2 R21.A
N$8: R3.A R17.2
N$9: R3.E R18.1
N$10: R4.E R19.1
N$11: R20.E R22.1
N$12: R21.E R23.1
N$13: ON.A R60.2
N$14: L.A R55.2
N$16: LED6.K R2.2
N$26: D11.1 IC9.1
N$30: D21.3 R73.2
N$31: R74.2 U1.1
N$32: R75.2 U1.3
N$33: R76.2 U1.5
N$34: R77.2 U1.7
N$37: D20.A U1.8
N$38: D19.A U1.6
N$40: D17.A U1.4
N$42: D16.A U1.2
N$81: Q22.1 R28.1 R44.2
N$82: Q1.1 R35.1 R53.2
P0W: C11.1 R3.S U$17.VREFA U$17.VREFB
P0W1: C17.1 R4.S U$1.VREFA U$1.VREFB
P0W2: C22.1 R20.S U$2.VREFA U$2.VREFB
P0W3: C27.1 R21.S U$7.VREFA U$7.VREFB
PART-FAN-NEG: D12.A J2.5 J2.6 Q22.4 X-END2.1
PH3: IC3.15
PH4: IC3.16
RESET: C14.1 C46.2 IC3.30 ICSP.5 R61.1 RST.1
RTS: U6.3
RXLED: R72.1 U6.22
SC: IC1.6 U2.5
SHLD: J3.SHLD1 J3.SHLD2 J3.SHLD3 J3.SHLD4 J3.SHLD5 J3.SHLD6 J3.SHLD7 J3.SHLD8
SPARE1: J2.10
SPARE2: J2.9
TXLED: R73.1 U6.23
V+PSU: PWRIN.2 U$4.TERM1.1 U$4.TERM1.2
V_USB: C43.1 C44.A D15.2 D21.1 D21.2 J3.VBUS1 J3.VBUS2 U6.4 U6.20
V_USB_AFTERDIODE: D15.1 T2.1
VM: BED.2 C1.+ C2.+ C10.1 C16.1 C21.1 C26.1 C32.A C35.A C37.A C38.A C39.A C40.+ C41.+ C42.+ C48.A D2.C D3.C D11.2 D12.C D13.C D14.C J1.5 J1.6 J1.7 J1.8 J2.3 J2.4 J2.7 J2.8 LED6.A R10.2 R11.2 R30.2 R31.2 R39.2 R40.2 R48.2 R49.2 R66.2 U$1.VM U$2.VM U$4.TERM2.1 U$4.TERM2.2 U$7.VM U$17.VM X-END1.2 X-END2.2 X-END3.2
XFAULT: LED1.A R56.1
XLO: R13.1 R56.2 U$17.LO
XMO: R14.1 U$17.MO
XMO1: R34.1 U$1.MO
XMO2: R43.1 U$2.MO
XMO3: R52.1 U$7.MO
XMODE0: R6.1 U$17.DMODE0
XMODE1: R8.1 SJ1.2 U$17.DMODE1
XMODE2: R9.1 SJ2.2 U$17.DMODE2
XOSCM: C12.1 R12.1 U$17.OSCM
XOSCM1: C18.1 R32.1 U$1.OSCM
XOSCM2: C23.1 R41.1 U$2.OSCM
XOSCM3: C33.1 R50.1 U$7.OSCM
XOUT-A+: D1.C U$17.OUTA+1 U$17.OUTA+2 Z-CONN1.1 Z-CONN1.2
XOUT-A-: D1.A U$17.OUTA-1 U$17.OUTA-2 Z-CONN1.3 Z-CONN1.4
XOUT-B+: D4.A U$17.OUTB+1 U$17.OUTB+2 Z-CONN1.7 Z-CONN1.8
XOUT-B-: D4.C U$17.OUTB-1 U$17.OUTB-2 Z-CONN1.5 Z-CONN1.6
XRSA: R11.1 U$17.RSA U$17.RSA2
XRSA1: R31.1 U$1.RSA U$1.RSA2
XRSB: R10.1 U$17.RSB1 U$17.RSB2
XRSB1: R30.1 U$1.RSB1 U$1.RSB2
XTAL1: C31.2 Q4.1 R54.2
XTAL1R: IC3.34 R54.1
XTAL2: C36.2 IC3.33 Q4.2
XVCCINT: C13.1 U$17.VCC
Y2FAULT: LED3.A R58.1
Y2LO: R42.1 R58.2 U$2.LO
Y2RSA2: R40.1 U$2.RSA U$2.RSA2
Y2RSB2: R39.1 U$2.RSB1 U$2.RSB2
Y2VCCINT: C24.1 U$2.VCC
YFAULT: LED2.A R57.1
YLO: R33.1 R57.2 U$1.LO
YMODE0: R15.1 U$1.DMODE0
YMODE1: R16.1 SJ3.2 U$1.DMODE1
YMODE2: R29.1 SJ4.2 U$1.DMODE2
YOUT-A+: D5.C J6.1 J6.2 U$1.OUTA+1 U$1.OUTA+2
YOUT-A-: D5.A J6.3 J6.4 U$1.OUTA-1 U$1.OUTA-2
YOUT-B+: D6.A J6.7 J6.8 U$1.OUTB+1 U$1.OUTB+2
YOUT-B-: D6.C J6.5 J6.6 U$1.OUTB-1 U$1.OUTB-2
YVCCINT: C19.1 U$1.VCC
ZFAULT: LED4.A R59.1
ZLO: R51.1 R59.2 U$7.LO
ZMODE0: R36.1 U$2.DMODE0
ZMODE1: R37.1 SJ7.2 U$2.DMODE1
ZMODE2: R38.1 SJ8.2 U$2.DMODE2
ZOUT-A+: D7.C J8.1 J8.2 U$2.OUTA+1 U$2.OUTA+2
ZOUT-A-: D7.A J8.3 J8.4 U$2.OUTA-1 U$2.OUTA-2
ZOUT-B+: D8.A J8.7 J8.8 U$2.OUTB+1 U$2.OUTB+2
ZOUT-B-: D8.C J8.5 J8.6 U$2.OUTB-1 U$2.OUTB-2
ZRSA3: R49.1 U$7.RSA U$7.RSA2
ZRSB3: R48.1 U$7.RSB1 U$7.RSB2
ZVCCINT: C34.1 U$7.VCC